# Altium PCB rocket_main.PcbDoc (part 2 of 2)
Units mil, origin at the board's own origin, x right, y up, seen from the top; angles counter-clockwise.
Board outline 3500 x 8650 mil, 4 copper layers (Top Copper, Signal Layer 1, Signal Layer 2, Bottom Copper), stack 61.811 mil thick; 167 components, 107 nets, 665 pads, 215 vias.
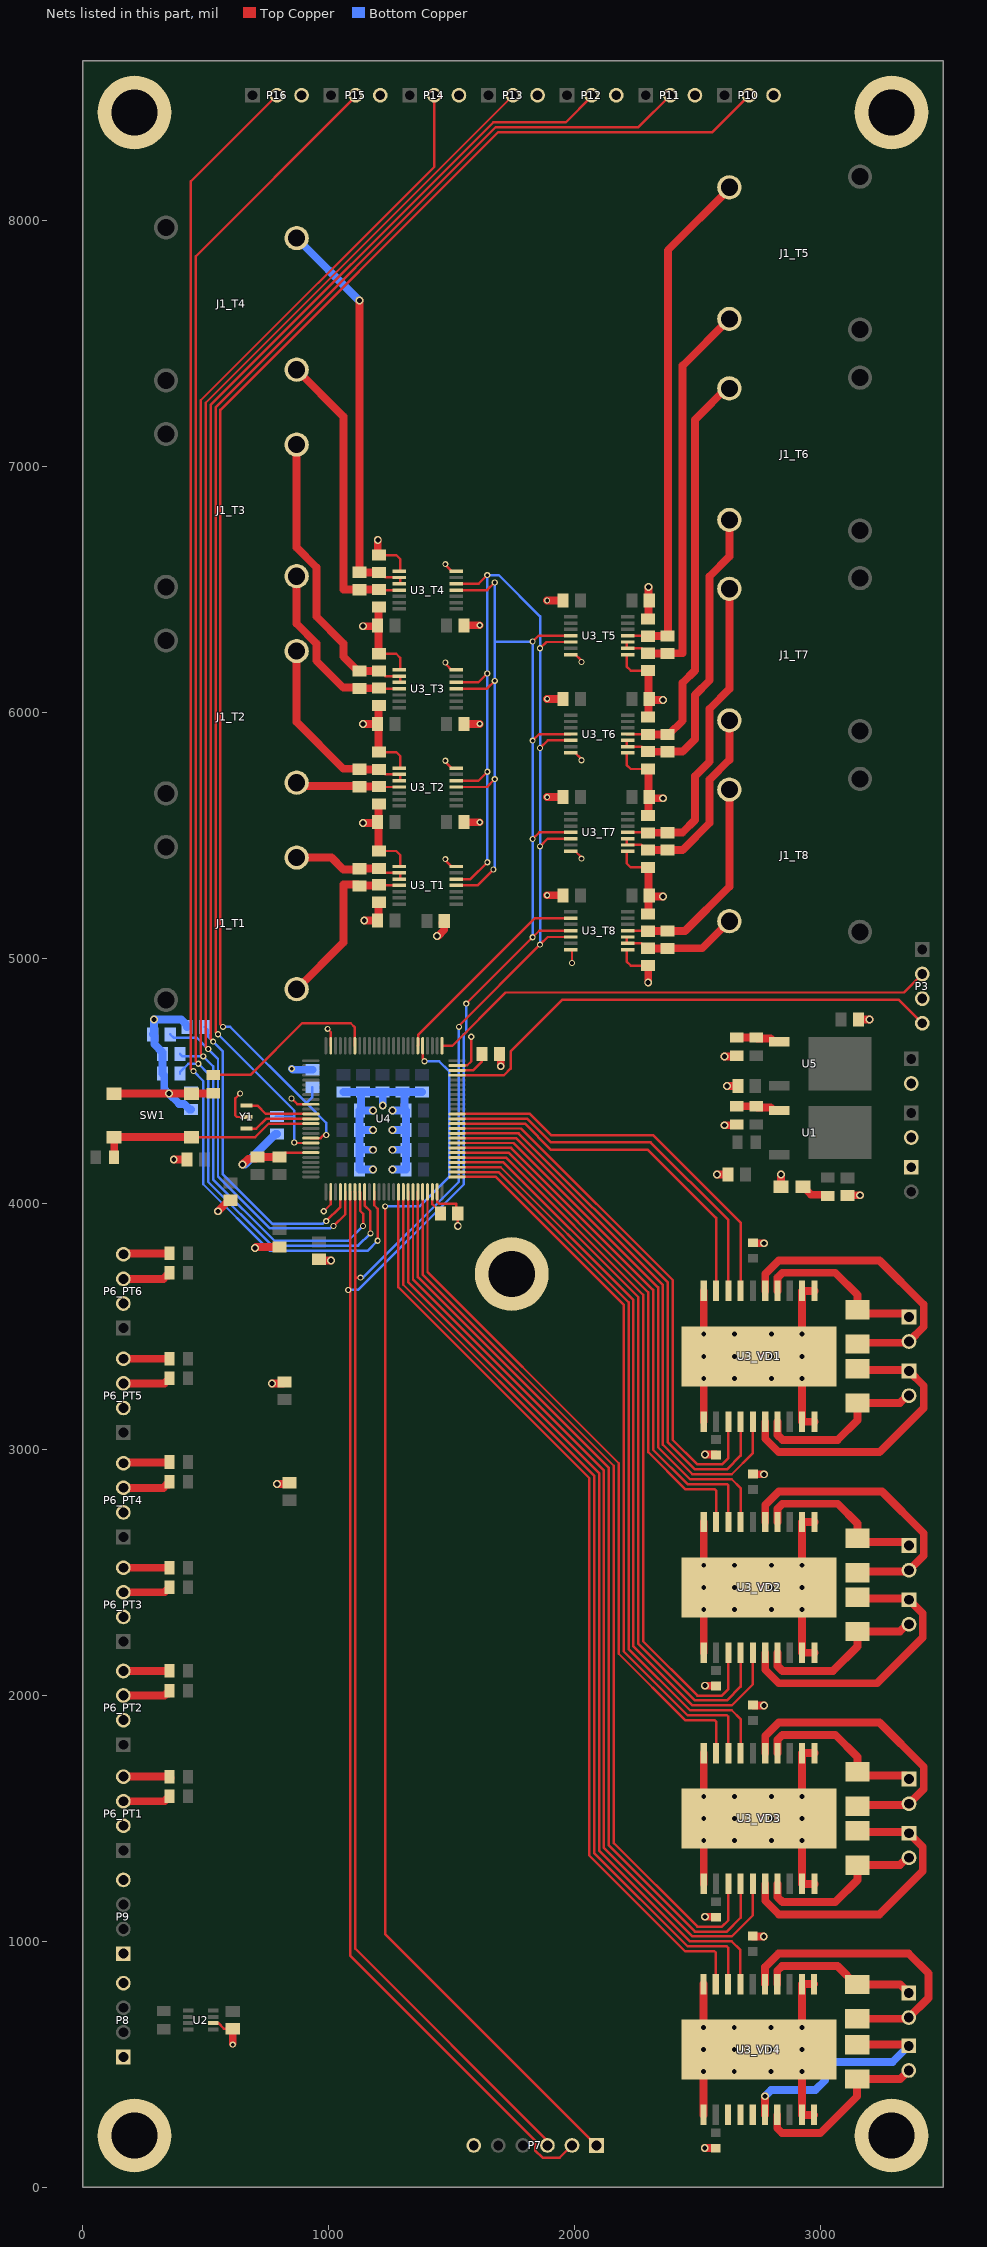
[diagram p4: the nets of this part, all layers, seen from the top]

## Via types
v1: diameter 32, hole 20, Top Copper to Bottom Copper, 129 vias
v2: diameter 25, hole 15, Top Copper to Bottom Copper, 86 vias

## Nets (pads, with @x,y where several pads share a name; then routed paths per layer and width w, separated by ;. In a path a pad name is that pad's centre, name@x,y a point inside that pad or via, vN(x,y) a via of type N, cw(c..) or ccw(c..) an arc to the next point about the centre after c; other vN are vias at no path point) (continued)
CS8: U3_T8.9 U4.81 | length 859.6
  Top Copper w10: U4.81@1362.8,4643.35 1364.02,4644.57 1364.02,4686.54 1840,5162.52 U3_T8.9@1982.72,5162.52
CS9: P7.1 U4.80 | length 5127.2
  Top Copper w10: v2(1230,3990) 1230,1030 P7.1@2090,170 P7.1@2110,150 ; U4.80@1382.48,4643.35 1382.48,4591.58 1390,4584.06 v2(1390,4580)
  Bottom Copper w10: v2(1230,3990) 1370,3990 1490,4110 1490,4540 1450,4580 v2(1390,4580)
ENABLEA1: U3_VD1.8 U4.63 | length 1562.5
  Top Copper w10: U4.63@1522.24,4346.1 1808.9,4346.1 1905,4250 2310,4250 2626,3934 U3_VD1.8@2626,3646
ENABLEA2: U3_VD2.8 U4.57 | length 2201.6
  Top Copper w10: U4.57@1522.24,4227.99 1742.01,4227.99 2320,3650 2320,3000 2460,2860 2620,2860 2626,2854 U3_VD2.8@2626,2706
ENABLEA3: U3_VD3.8 U4.51 | length 2987.3
  Top Copper w10: U4.51@1522.24,4109.88 1680.12,4109.88 2200,3590 2200,2180 2460,1920 2620,1920 2626,1914 U3_VD3.8@2626,1766
ENABLEA4: U3_VD4.8 U4.42 | length 3863.4
  Top Copper w10: U4.42@1303.74,4048.86 1303.74,3671.26 2080,2895 2080,1360 2460,980 2619.14,980 2625,974.14 U3_VD4.8@2625,826
ENABLEB1: U3_VD1.14 U4.60 | length 2262
  Top Copper w10: U4.60@1522.24,4287.05 1772.95,4287.05 2380,3680 2380,3030 2490,2920 2620,2920 2676,2976 U3_VD1.14@2676,3114
ENABLEB2: U3_VD2.14 U4.54 | length 3047.6
  Top Copper w10: U4.54@1522.24,4168.94 1711.06,4168.94 2260,3620 2260,2210 2490,1980 2620,1980 2676,2036 U3_VD2.14@2676,2174
ENABLEB3: U3_VD3.14 U4.45 | length 3823
  Top Copper w10: U4.45@1362.8,4048.86 1362.8,3702.2 2140,2925 2140,1390 2490,1040 2620,1040 2676,1096 U3_VD3.14@2676,1234
ENABLEB4: U3_VD4.14
GND: C1.2 C2.2 C3.2 C4.2 C5.2 C6.2 C7.2 C8.2 C9.2 C10.2 C11.2 C12.2 C13.2 C14.2 C15.2 C16.2 C17.2 C18.2 C19.2 C20_T1.2 C20_T2.2 C20_T3.2 C20_T4.2 C20_T5.2 C20_T6.2 C20_T7.2 C20_T8.2 C20_VD1.2 C20_VD2.2 C20_VD3.2 C20_VD4.2 C21_VD1.2 C21_VD2.2 C21_VD3.2 C21_VD4.2 C22.2 C22_T1.2 C22_T2.2 C22_T3.2 C22_T4.2 C22_T5.2 C22_T6.2 C22_T7.2 C22_T8.2 C23.2 C23_T1.2 C23_T2.2 C23_T3.2 C23_T4.2 C23_T5.2 C23_T6.2 C23_T7.2 C23_T8.2 C24_T1.2 C24_T2.2 C24_T3.2 C24_T4.2 C24_T5.2 C24_T6.2 C24_T7.2 C24_T8.2 C25.2 C26_PT1.2 C26_PT2.2 C26_PT3.2 C26_PT4.2 C26_PT5.2 C26_PT6.2 C27.2 C28.2 C29.2 C30.2 C31.2 C32.2 C33.2 D3.K P1.1 P2.2 P3.3 P6.2 P6_PT1.2 P6_PT1.4 P6_PT2.2 P6_PT2.4 P6_PT3.2 P6_PT3.4 P6_PT4.2 P6_PT4.4 P6_PT5.2 P6_PT5.4 P6_PT6.2 P6_PT6.4 P7.6 P8.1 P8.4 P9.1 P9.4 P10.3 P11.3 P12.3 P13.3 P14.3 P15.3 P16.3 pad.2 pad.3 pad.4 pad.5 R2.1 R4.2 R6.1 R7_PT1.1 R7_PT2.1 R7_PT3.1 R7_PT4.1 R7_PT5.1 R7_PT6.1 SW1.2 U2.2 U3_T1.1 U3_T1.14 U3_T2.1 U3_T2.14 U3_T3.1 U3_T3.14 U3_T4.1 U3_T4.14 U3_T5.1 U3_T5.14 U3_T6.1 U3_T6.14 U3_T7.1 U3_T7.14 U3_T8.1 U3_T8.14 U3_VD1.1 U3_VD1.2 U3_VD1.10 U3_VD1.11 U3_VD1.19 U3_VD1.20 U3_VD1.EPAD U3_VD2.1 U3_VD2.2 U3_VD2.10 U3_VD2.11 U3_VD2.19 U3_VD2.20 U3_VD2.EPAD U3_VD3.1 U3_VD3.2 U3_VD3.10 U3_VD3.11 U3_VD3.19 U3_VD3.20 U3_VD3.EPAD U3_VD4.1 U3_VD4.2 U3_VD4.10 U3_VD4.11 U3_VD4.19 U3_VD4.20 U3_VD4.EPAD U4.10 U4.20 U4.27 U4.49 U4.74 U4.99 Y1.2 | length 16404.2
  Top Copper w10: R4.2@530,4450 R4.2@536.89,4450 ; U2.2@531.18,667.2 551.46,667.2 574.09,644.57 580,644.57 ; v2(640,4449.29) 620,4429.29 620,4360 626.5,4353.5 Y1.2@666.02,4353.5 ; C5.2@800,4190.43 805.91,4190.43 823.78,4208.31 U4.20@927.76,4208.31 ; v2(849,4429) 872.84,4405.16 U4.10@927.76,4405.16 ; v2(980,3970) 1008.46,3998.46 U4.27@1008.46,4048.86 ; v2(996,4712) 996,4711.11 1008.46,4698.64 U4.99@1008.46,4643.35 ; C20_T1.2@1204.92,5435.63 1274.92,5435.63 1291.42,5419.13 U3_T1.1@1291.42,5372.6 ; C20_T2.2@1204.92,5838.03 1274.92,5838.03 1291.42,5821.54 U3_T2.1@1291.42,5772.6 ; C20_T3.2@1205.04,6237.91 1274.92,6237.91 1291.42,6221.42 U3_T3.1@1291.42,6172.6 ; C20_T4.2@1210.94,6639.25 1274.92,6639.25 1291.42,6622.76 U3_T4.1@1291.42,6573.82 ; U4.49@1441.54,4048.86 1442.76,4047.64 1442.76,4007.24 1450,4000 1519.58,4000 1519.58,3965.86 C19.2@1525.43,3960 v1(1525.43,3910) ; v2(1474.92,5402.6) 1477.79,5399.73 1477.79,5395.2 1500.39,5372.6 U3_T1.14@1519.09,5372.6 U3_T1.14@1521.06,5372.6 ; v2(1474.92,5802.6) 1477.79,5799.73 1477.79,5795.2 1500.39,5772.6 U3_T2.14@1519.09,5772.6 U3_T2.14@1521.06,5772.6 ; v2(1474.92,6202.6) 1477.79,6199.73 1477.79,6195.2 1500.39,6172.6 U3_T3.14@1519.09,6172.6 U3_T3.14@1521.06,6172.6 ; v2(1474.92,6602.6) 1474.92,6599.29 1500.39,6573.82 U3_T4.14@1519.09,6573.82 U3_T4.14@1521.06,6573.82 ; U4.74@1522.24,4562.64 1523.46,4563.86 1563.86,4563.86 1580,4580 v2(1580,4680) ; U3_T7.14@1982.72,5434.57 U3_T7.14@1984.69,5434.57 2003.39,5434.57 2025.99,5411.96 2025.99,5407.44 v2(2028.86,5404.57) ; U3_T6.14@1982.72,5834.57 U3_T6.14@1984.69,5834.57 2003.39,5834.57 2025.99,5811.96 2025.99,5807.44 v2(2028.86,5804.57) ; U3_T5.14@1982.72,6234.57 U3_T5.14@1984.69,6234.57 2003.39,6234.57 2025.99,6211.96 2025.99,6207.44 v2(2028.86,6204.57) ; U3_T8.14@1984.69,5034.57 1990,5029.25 v2(1990,4980) ; U3_T8.1@2212.36,5034.57 2212.36,4985.63 2228.86,4969.13 C20_T8.2@2298.74,4969.13 ; U3_T7.1@2212.36,5434.57 2212.36,5385.63 2228.86,5369.13 C20_T7.2@2298.74,5369.13 ; U3_T6.1@2212.36,5834.57 2212.36,5785.63 2228.86,5769.13 C20_T6.2@2298.74,5769.13 ; U3_T5.1@2212.36,6234.57 2212.36,6185.63 2228.86,6169.13 C20_T5.2@2299.29,6169.13
  Top Copper w32: SW1.2@126.1,4450 SW1.2@127.52,4448.58 v1(350,4448.58) SW1.2@442.48,4448.58 443.19,4449.29 529.29,4449.29 R4.2@530,4450 ; P6_PT2.4@165,2100 R7_PT2.1@352.6,2100 R7_PT2.1@353.58,2100.98 ; P6_PT3.4@165,2520 R7_PT3.1@352.6,2520 R7_PT3.1@353.58,2520.98 ; P6_PT4.4@165,2945 167.5,2947.5 350.1,2947.5 R7_PT4.1@352.6,2950 R7_PT4.1@353.58,2950.98 ; P6_PT5.4@165,3370 R7_PT5.1@352.6,3370 R7_PT5.1@353.58,3370.98 ; P6_PT6.4@165,3795 167.5,3797.5 350.1,3797.5 R7_PT6.1@352.6,3800 R7_PT6.1@353.58,3800.98 ; P6_PT1.4@170,1665 P6_PT1.4@165,1670 347.93,1670 352.6,1665.33 352.6,1665 R7_PT1.1@357.6,1665 ; R7_PT1.1@352.6,1670 R7_PT1.1@353.58,1670.98 ; v1(370,4180) C26_PT6.2@424.57,4180 C26_PT6.2@423.58,4179.02 ; v1(550,3970) 550,3970.47 594.09,4014.57 C26_PT5.2@600,4014.57 C26_PT5.2@600.98,4013.58 ; v2@610,585.13 C3.2@610,640 ; v1(650,4160) 673.8,4183.8 703.36,4183.8 C4.2@710,4190.43 C5.2@800,4190.43 ; v1(700,3820) 704.57,3824.57 C26_PT4.2@800,3824.57 C26_PT4.2@800.98,3823.58 ; v1(770,3270) 814.57,3270 C26_PT3.2@820,3275.43 C26_PT3.2@819.02,3276.42 ; v1(790,2860) 834.57,2860 C26_PT2.2@840,2865.43 C26_PT2.2@839.02,2866.42 ; C26_PT1.2@960.98,3774.57 965.55,3770 v1(1010,3770) ; v1(1140,5550) 1196.89,5550 C23_T2.2@1199.49,5552.6 ; v1(1140,5952.6) C23_T3.2@1199.49,5952.6 ; v1(1140,6350) 1195.67,6350 C23_T4.2@1199.49,6353.82 ; v1(1144.92,5152.6) C23_T1.2@1199.49,5152.6 1202.2,5155.32 1202.2,5224.45 C22_T1.2@1204.92,5227.17 ; v1(1200,6700) 1200,6644.29 C20_T4.2@1205.04,6639.25 C20_T4.2@1210.94,6639.25 ; C20_T1.2@1204.92,5435.63 1202.2,5438.35 1202.2,5549.88 C23_T2.2@1199.49,5552.6 ; C22_T2.2@1204.92,5627.17 1202.2,5624.45 1202.2,5555.32 C23_T2.2@1199.49,5552.6 ; C20_T2.2@1204.92,5838.03 1202.2,5840.75 1202.2,5949.88 C23_T3.2@1199.49,5952.6 ; C22_T3.2@1204.92,6027.17 1202.2,6024.45 1202.2,5955.32 C23_T3.2@1199.49,5952.6 ; C20_T3.2@1205.04,6237.91 C20_T3.2@1204.92,6238.03 1202.2,6240.75 1202.2,6351.1 C23_T4.2@1199.49,6353.82 ; C22_T4.2@1205.04,6428.39 1202.26,6425.61 1202.26,6356.59 C23_T4.2@1199.49,6353.82 ; v1(1440.43,5090) 1445.43,5090 1470.43,5115 C24_T1.2@1470.43,5150 C24_T1.2@1463.8,5143.36 ; C24_T2.2@1550.35,5552.6 v2(1614.92,5552.6) ; C24_T3.2@1550.35,5952.6 v2(1614.92,5952.6) ; C24_T4.2@1550.35,6353.82 v2(1614.92,6353.82) ; C25.2@1695.43,4610 1700,4605.43 v1(1700,4560) ; v2(1888.86,5255.28) C24_T8.2@1953.43,5255.28 ; v2(1888.86,5654.57) C24_T7.2@1953.43,5654.57 ; v2(1888.86,6054.57) C24_T6.2@1953.43,6054.57 ; v2(1888.86,6454.57) C24_T5.2@1953.43,6454.57 ; C20_T8.2@2298.74,4969.13 2300,4967.87 v1(2300,4900) ; C20_T7.2@2298.74,5369.13 2301.52,5366.36 2301.52,5257.34 C23_T8.2@2304.29,5254.57 ; C22_T7.2@2298.74,5580 2301.52,5582.78 2301.52,5651.79 C23_T7.2@2304.29,5654.57 ; C20_T6.2@2298.74,5769.13 2301.52,5766.36 2301.52,5657.34 C23_T7.2@2304.29,5654.57 ; C22_T6.2@2298.74,5980 2301.52,5982.78 2301.52,6051.79 C23_T6.2@2304.29,6054.57 ; C22_T5.2@2298.74,6380 2301.52,6382.78 2301.52,6451.79 C23_T5.2@2304.29,6454.57 2301.52,6457.34 v1(2301.52,6510) ; C22_T8.2@2299.29,5180 2301.79,5182.5 2301.79,5252.07 C23_T8.2@2304.29,5254.57 ; C20_T5.2@2299.29,6169.13 2301.79,6166.63 2301.79,6057.07 C23_T6.2@2304.29,6054.57 ; v1(2360,5250) 2308.86,5250 C23_T8.2@2304.29,5254.57 ; v1(2360,5650) 2308.86,5650 C23_T7.2@2304.29,5654.57 ; v1(2360,6050) 2308.86,6050 C23_T6.2@2304.29,6054.57 ; U3_VD4.11@2525,294 2525,454 U3_VD4.EPAD@2631,560 ; U3_VD4.10@2525,826 2525,666 U3_VD4.EPAD@2631,560 ; U3_VD3.11@2526,1234 2526,1394 U3_VD3.EPAD@2632,1500 ; U3_VD3.10@2526,1766 2526,1606 U3_VD3.EPAD@2632,1500 ; U3_VD2.11@2526,2174 2526,2334 U3_VD2.EPAD@2632,2440 ; U3_VD2.10@2526,2706 2526,2546 U3_VD2.EPAD@2632,2440 ; U3_VD1.11@2526,3114 2526,3274 U3_VD1.EPAD@2632,3380 ; U3_VD1.10@2526,3646 2526,3486 U3_VD1.EPAD@2632,3380 ; v1(2530,160) 2573.5,160 C21_VD4.2@2575,158.5 ; v1(2531,1100) C21_VD3.2@2574.5,1100 ; v1(2531,2040) 2574.5,2040 C21_VD2.2@2576,2038.5 ; v1(2531,2980) 2574.5,2980 C21_VD1.2@2576,2978.5 ; v1(2580,4120) 2624.13,4120 C2.2@2624.57,4119.57 ; v1(2610,4320) 2657.4,4320 R2.1@2660,4322.6 ; v1(2610,4600) 2657.4,4600 R6.1@2660,4602.6 ; v1(2620,4479.57) 2663.9,4479.57 C23.2@2664.57,4480.24 ; C20_VD4.2@2725,1021.5 2726.5,1020 v1(2770,1020) ; C20_VD3.2@2726,1961.5 2727.5,1960 v1(2771,1960) ; C20_VD2.2@2726,2901.5 2727.5,2900 v1(2771,2900) ; C20_VD1.2@2726,3841.5 2727.5,3840 v1(2771,3840) ; D3.K@2840,4070 v1(2840,4120) ; U3_VD4.20@2975,294 U3_VD4.19@2925,294 2925,454 U3_VD4.EPAD@2819,560 ; U3_VD4.1@2975,826 U3_VD4.2@2925,826 2925,666 U3_VD4.EPAD@2819,560 ; U3_VD3.20@2976,1234 U3_VD3.19@2926,1234 2926,1394 U3_VD3.EPAD@2820,1500 ; U3_VD3.1@2976,1766 U3_VD3.2@2926,1766 2926,1606 U3_VD3.EPAD@2820,1500 ; U3_VD2.20@2976,2174 U3_VD2.19@2926,2174 2926,2334 U3_VD2.EPAD@2820,2440 ; U3_VD2.1@2976,2706 U3_VD2.2@2926,2706 2926,2546 U3_VD2.EPAD@2820,2440 ; U3_VD1.20@2976,3114 U3_VD1.19@2926,3114 2926,3274 U3_VD1.EPAD@2820,3380 ; U3_VD1.1@2976,3646 U3_VD1.2@2926,3646 2926,3486 U3_VD1.EPAD@2820,3380 ; C1.2@3110,4034.57 3110.43,4035 v1(3161.5,4035) ; C22.2@3155.43,4750 v1(3200,4750) ; U3_VD4.EPAD@2631,560 v1(2650,560) U3_VD4.EPAD@2750,560 v1(2800,560) U3_VD4.EPAD@2819,560 ; U3_VD3.EPAD@2632,1500 v1(2651,1500) U3_VD3.EPAD@2751,1500 v1(2801,1500) U3_VD3.EPAD@2820,1500 ; U3_VD2.EPAD@2632,2440 v1(2651,2440) U3_VD2.EPAD@2751,2440 v1(2801,2440) U3_VD2.EPAD@2820,2440 ; U3_VD1.EPAD@2632,3380 v1(2651,3380) U3_VD1.EPAD@2751,3380 v1(2801,3380) U3_VD1.EPAD@2820,3380
  Bottom Copper w32: C29.2@424.57,4720 424.57,4725.91 400.47,4750 v1(290,4750) 290,4695.43 C30.2@284.57,4690 291.2,4683.36 291.2,4649.27 324.57,4615.91 C31.2@324.57,4610 C32.2@324.57,4530 331.2,4523.36 331.2,4467.38 v1(350,4448.58) 391.79,4406.8 411.87,4406.8 434.09,4384.57 C33.2@440,4384.57 ; v1(650,4160) 659.53,4160 784.09,4284.57 C28.2@790,4284.57 ; v2(850,4550) 854.57,4545.43 C27.2@934.1,4545.43 ; C10.2@1060,4454.57 C9.2@1138.71,4454.57 ; v1(1180,4140) C15.2@1125.43,4140 C16.2@1125.43,4220 ; v1(1180,4220) C16.2@1125.43,4220 ; v1(1180,4300) C17.2@1125.43,4300 ; v1(1180,4380) C18.2@1125.43,4380 ; v1(1220,4400) C8.2@1220,4454.57 ; v1(1260,4140) C14.2@1314.57,4140 C13.2@1314.57,4220 ; v1(1260,4220) C13.2@1314.57,4220 ; v1(1260,4300) C12.2@1314.57,4300 ; v1(1260,4380) C11.2@1314.57,4380 ; C6.2@1380,4454.57 C7.2@1301.29,4454.57 ; C16.2@1125.43,4220 C17.2@1125.43,4300 ; C17.2@1125.43,4300 C18.2@1125.43,4380 ; C18.2@1125.43,4380 1132.07,4386.64 1132.07,4447.93 C9.2@1138.71,4454.57 ; C9.2@1138.71,4454.57 C9.2@1140,4454.57 C8.2@1220,4454.57 ; C8.2@1220,4454.57 C7.2@1300,4454.57 C7.2@1301.29,4454.57 ; C7.2@1301.29,4454.57 1307.93,4447.93 1307.93,4386.64 C11.2@1314.57,4380 ; C13.2@1314.57,4220 C12.2@1314.57,4300 ; C12.2@1314.57,4300 C11.2@1314.57,4380
  other v1: 2525,470 2650,470 2800,470 2925,470 2525,560 2925,560 2525,650 2650,650 2800,650 2925,650 2526,1410 2651,1410 2801,1410 2926,1410 2526,1500 2926,1500 2526,1590 2651,1590 2801,1590 2926,1590 2526,2350 2651,2350 2801,2350 2926,2350 2526,2440 2926,2440 2526,2530 2651,2530 2801,2530 2926,2530 2526,3290 2651,3290 2801,3290 2926,3290 2526,3380 2926,3380 2526,3470 2651,3470 2801,3470 2926,3470
  other v2: 610,580
MISO: P7.2 U3_T1.11 U3_T2.11 U3_T3.11 U3_T4.11 U3_T5.11 U3_T6.11 U3_T7.11 U3_T8.11 U4.31 | length 10050.6
  Top Copper w10: v2(1080.03,3650) v2@1087.2,3650 ; U4.31@1087.2,4048.86 v2@1087.2,3650 ; U3_T4.11@1501.06,6497.05 U3_T4.11@1519.09,6497.05 1644.88,6497.05 v2(1675.63,6527.8) ; U3_T1.11@1521.06,5295.83 1605.83,5295.83 v2(1670,5360) ; U3_T2.11@1521.06,5695.83 1643.66,5695.83 v2(1675.63,5727.8) ; U3_T3.11@1521.06,6095.83 1643.66,6095.83 v2(1675.63,6127.8) ; v2(1560,4814.57) v2(1830,5084.57) 1856.77,5111.34 U3_T8.11@1982.72,5111.34 ; v2(1830,5484.57) 1856.77,5511.34 U3_T7.11@1982.72,5511.34 ; v2(1830,5884.57) 1856.77,5911.34 U3_T6.11@1982.72,5911.34 ; v2(1830,6287.66) 1853.68,6311.34 U3_T5.11@1982.72,6311.34 ; P7.2@1990,170 1940,120 1870,120 1840,150 1840,190 1087.2,942.8 v2@1087.2,3650
  Bottom Copper w10: v2(1080.03,3650) 1120,3650 1550,4080 1550,4690 1560,4700 v2(1560,4814.57) ; v2(1670,5360) 1675.63,5365.63 v2(1675.63,5727.8) v2(1675.63,6127.8) 1675.63,6290 ; v2(1675.63,6527.8) 1675.63,6290 ; v2(1830,5084.57) v2(1830,5484.57) v2(1830,5884.57) v2(1830,6287.66) 1677.97,6287.66 1675.63,6290
MOSI: P7.3 U3_T1.12 U3_T2.12 U3_T3.12 U3_T4.12 U3_T5.12 U3_T6.12 U3_T7.12 U3_T8.12 U4.32 | length 9787.5
  Top Copper w10: U4.32@1106.89,4048.86 1108.11,4047.64 1108.11,3700 ; v2(1130,3700) 1108.11,3700 ; U3_T4.12@1501.06,6522.64 1521.06,6522.64 1610.04,6522.64 v2(1645.2,6557.8) ; U3_T1.12@1521.06,5321.42 1577.05,5321.42 v2(1645.63,5390) ; U3_T2.12@1521.06,5721.42 1609.25,5721.42 v2(1645.63,5757.8) ; U3_T3.12@1521.06,6121.42 1608.82,6121.42 v2(1645.2,6157.8) ; v2(1530,4720) 1530,4724.57 v2(1860,5054.57) 1891.18,5085.75 U3_T8.12@1982.72,5085.75 ; v2(1860,5454.57) 1891.18,5485.75 U3_T7.12@1982.72,5485.75 ; v2(1860,5854.57) 1891.18,5885.75 U3_T6.12@1982.72,5885.75 ; v2(1860,6260.16) 1885.59,6285.75 U3_T5.12@1982.72,6285.75 ; P7.3@1888.86,171.14 P7.3@1890,170 ; P7.3@1888.86,190 1108.11,970.75 1108.11,3700
  Bottom Copper w10: v2(1130,3700) 1140,3700 1530,4090 v2(1530,4720) ; v2(1645.63,5390) v2(1645.63,5757.8) 1645.63,5951.89 1645.2,5952.32 v2(1645.2,6157.8) v2(1645.2,6557.8) 1692.2,6557.8 1860,6390 v2(1860,6260.16) v2(1860,5854.57) v2(1860,5454.57) v2(1860,5054.57)
NetC19_1: C19.1 U4.48 | length 104.3
  Top Copper w10: U4.48@1421.85,4048.86 1421.85,3998.62 1451.42,3969.06 C19.1@1451.42,3956.85
NetC20_T1_1: C20_T1.1 C21_T1.1 J1_T1.K U3_T1.2 U3_T1.3 | length 476.5
  Top Copper w10: C20_T1.1@1204.92,5364.76 1222.56,5347.13 1291.3,5347.13 1291.42,5347.01 U3_T1.3@1291.42,5321.42
  Top Copper w32: J1_T1.K@870,5408.74 1011.26,5408.74 1060,5360 1121.46,5360 C21_T1.1@1124.92,5363.46 1125.57,5364.11 1204.27,5364.11 C20_T1.1@1204.92,5364.76
NetC20_T2_1: C20_T2.1 C21_T2.1 J1_T2.K U3_T2.2 U3_T2.3 | length 824
  Top Copper w10: C20_T2.1@1204.92,5767.17 1210.83,5767.17 1230.98,5747.01 1268.78,5747.01 1291.42,5747.01 U3_T2.3@1291.42,5721.42
  Top Copper w32: J1_T2.K@870,6248.74 870,5960 1060,5770 1123.6,5770 C21_T2.1@1125.57,5768.03 1126,5767.6 1204.49,5767.6 C20_T2.1@1204.92,5767.17
NetC20_T3_1: C20_T3.1 C21_T3.1 J1_T3.K U3_T3.2 U3_T3.3 | length 1230.6
  Top Copper w10: C20_T3.1@1204.49,6167.6 1210.39,6167.6 1230.98,6147.01 1268.78,6147.01 1291.42,6147.01 U3_T3.3@1291.42,6121.42
  Top Copper w32: J1_T3.K@870,7088.74 870,6670 950,6590 950,6390 1060,6280 1060,6227.05 1119.02,6168.03 C21_T3.1@1124.92,6168.03 1125.35,6167.6 C20_T3.1@1204.49,6167.6
NetC20_T4_1: C20_T4.1 C21_T4.1 J1_T4.K U3_T4.2 U3_T4.3 | length 1666.7
  Top Copper w10: v1@1124.92,7674.92 v1(1125,7675) ; C20_T4.1@1205.04,6568.39 1210.94,6568.39 1231.1,6548.23 1268.78,6548.23 1291.42,6548.23 U3_T4.3@1291.42,6522.64
  Top Copper w32: v1@1124.92,7674.92 C21_T4.1@1124.92,6569.25 1125.35,6568.82 1204.61,6568.82 C20_T4.1@1205.04,6568.39
  Bottom Copper w10: v1@1123.74,7675 v1(1125,7675)
  Bottom Copper w32: J1_T4.K@870,7928.74 v1@1123.74,7675
NetC20_T5_1: C20_T5.1 C21_T5.1 J1_T5.K U3_T5.2 U3_T5.3 | length 1701
  Top Copper w10: U3_T5.3@2212.36,6285.75 2212.36,6260.16 U3_T5.2@2216.97,6260.16 2273.23,6260.16 2293.39,6240 C20_T5.1@2299.29,6240
  Top Copper w32: C20_T5.1@2299.29,6240 2299.72,6239.57 2378.43,6239.57 C21_T5.1@2378.86,6239.13 2379.72,6240 2440,6240 2440,7410 J1_T5.K@2630,7600
NetC20_T6_1: C20_T6.1 C21_T6.1 J1_T6.K U3_T6.2 U3_T6.3 | length 1283.3
  Top Copper w10: U3_T6.3@2212.36,5885.75 2212.36,5860.16 U3_T6.2@2216.97,5860.16 2272.68,5860.16 2292.83,5840 C20_T6.1@2298.74,5840
  Top Copper w32: C20_T6.1@2298.74,5840 2299.17,5839.57 2377.78,5839.57 C21_T6.1@2378.21,5839.13 2379.07,5840 2440,5840 2490,5890 2490,6070 2550,6130 2550,6553.31 2630,6633.31 J1_T6.K@2630,6782.28
NetC20_T7_1: C20_T7.1 C21_T7.1 J1_T7.K U3_T7.2 U3_T7.3 | length 867.8
  Top Copper w10: U3_T7.3@2212.36,5485.75 2212.36,5460.16 U3_T7.2@2216.97,5460.16 2272.68,5460.16 2292.83,5440 C20_T7.1@2298.74,5440
  Top Copper w32: C20_T7.1@2298.74,5440 2299.17,5439.57 2377.34,5439.57 C21_T7.1@2377.78,5439.13 2378.64,5440 2440,5440 2550,5550 2550,5726.36 2630,5806.36 J1_T7.K@2630,5966.85
NetC20_T8_1: C20_T8.1 C21_T8.1 J1_T8.K U3_T8.2 U3_T8.3 | length 497.9
  Top Copper w10: U3_T8.3@2212.36,5085.75 2212.36,5060.16 2235,5060.16 2272.68,5060.16 2292.83,5040 C20_T8.1@2298.74,5040
  Top Copper w32: C20_T8.1@2298.74,5040 2299.17,5039.57 2378.43,5039.57 C21_T8.1@2378.86,5039.13 2379.72,5040 2450,5040 2520,5040 J1_T8.K@2630,5150
NetC21_T1_2: C21_T1.2 C22_T1.1 J1_T1.+ U3_T1.4 | length 743
  Top Copper w10: C22_T1.1@1204.92,5298.03 1207.13,5295.83 1268.78,5295.83 U3_T1.4@1291.42,5295.83
  Top Copper w32: J1_T1.+@870,4873.31 1060,5063.31 1060,5300 1060.76,5299.24 1118.28,5299.24 C21_T1.2@1124.92,5292.6 1127.64,5295.32 1202.2,5295.32 C22_T1.1@1204.92,5298.03
NetC21_T2_2: C21_T2.2 C22_T2.1 J1_T2.+ U3_T2.4 | length 429.4
  Top Copper w10: C22_T2.1@1204.92,5698.03 1207.13,5695.83 1268.78,5695.83 U3_T2.4@1291.42,5695.83
  Top Copper w32: J1_T2.+@870,5713.31 882.71,5700.6 929.4,5700.6 930,5700 1060,5700 1122.74,5700 C21_T2.2@1125.57,5697.17 1126,5697.6 1204.49,5697.6 C22_T2.1@1204.92,5698.03
NetC21_T3_2: C21_T3.2 C22_T3.1 J1_T3.+ U3_T3.4 | length 765.9
  Top Copper w10: C22_T3.1@1204.92,6098.03 1207.13,6095.83 1268.78,6095.83 U3_T3.4@1291.42,6095.83
  Top Copper w32: J1_T3.+@870,6553.31 870,6360 950,6280 950,6210 1060,6100 1122.09,6100 C21_T3.2@1124.92,6097.17 1125.35,6097.6 1204.49,6097.6 C22_T3.1@1204.92,6098.03
NetC21_T4_2: C21_T4.2 C22_T4.1 J1_T4.+ U3_T4.4 | length 1205
  Top Copper w10: C22_T4.1@1204.61,6498.82 1206.38,6497.05 1268.78,6497.05 U3_T4.4@1291.42,6497.05
  Top Copper w32: J1_T4.+@870,7393.31 1060,7203.31 1060,6500 1123.31,6500 C21_T4.2@1124.92,6498.39 1125.35,6498.82 C22_T4.1@1204.61,6498.82
NetC21_T5_2: C21_T5.2 C22_T5.1 J1_T5.+ U3_T5.4 | length 2095.3
  Top Copper w10: U3_T5.4@2212.36,6311.34 U3_T5.4@2216.97,6311.34 2296.54,6311.34 C22_T5.1@2298.74,6309.13
  Top Copper w32: C22_T5.1@2298.74,6309.13 2299.17,6309.57 2378.43,6309.57 C21_T5.2@2378.86,6310 2380,6311.14 2380,7879 J1_T5.+@2633.22,8132.22
NetC21_T6_2: C21_T6.2 C22_T6.1 J1_T6.+ U3_T6.4 | length 1694.9
  Top Copper w10: U3_T6.4@2212.36,5911.34 U3_T6.4@2216.97,5911.34 2296.54,5911.34 C22_T6.1@2298.74,5909.13
  Top Copper w32: C22_T6.1@2298.74,5909.13 2299.17,5909.57 2377.78,5909.57 C21_T6.2@2378.21,5910 2384.11,5910 2440,5965.89 2440,6120 2490,6170 2490,7190 J1_T6.+@2630,7330
NetC21_T7_2: C21_T7.2 C22_T7.1 J1_T7.+ U3_T7.4 | length 1299.1
  Top Copper w10: U3_T7.4@2212.36,5511.34 U3_T7.4@2216.97,5511.34 2296.54,5511.34 C22_T7.1@2298.74,5509.13
  Top Copper w32: C22_T7.1@2298.74,5509.13 2299.17,5509.57 2377.34,5509.57 C21_T7.2@2377.78,5510 2379.14,5511.36 2440,5511.36 2490,5561.36 2490,5740 2550,5800 2550,6014.48 2630,6094.48 J1_T7.+@2630,6502.28
NetC21_T8_2: C21_T8.2 C22_T8.1 J1_T8.+ U3_T8.4 | length 888.5
  Top Copper w10: U3_T8.4@2212.36,5111.34 2235,5111.34 2297.95,5111.34 C22_T8.1@2299.72,5109.57
  Top Copper w32: C22_T8.1@2299.72,5109.57 2378.43,5109.57 C21_T8.2@2378.86,5110 2450,5110 2630,5290 J1_T8.+@2630,5685.43
NetC25_1: C25.1 U4.73 | length 147.7
  Top Copper w10: U4.73@1522.24,4542.95 1587.52,4542.95 1622.52,4577.95 1622.52,4607.95 C25.1@1624.57,4610
NetD1_VD1_A: D1_VD1.A P4_VD1.1 U3_VD1.4 | length 706.9
  Top Copper w32: U3_VD1.4@2826,3646 2826,3700 2846,3720 3061,3720 3151,3630 3151,3570.24 D1_VD1.A@3151.24,3570 3167.24,3554 3347,3554 P4_VD1.1@3361,3540
NetD1_VD1_K: D1_VD1.K P4_VD1.2 U3_VD1.5 | length 1200.3
  Top Copper w32: U3_VD1.5@2776,3646 2776,3715 2831,3770 3241,3770 3421,3590 3421,3500 P4_VD1.2@3361,3440 3356.12,3435.12 3156.12,3435.12 D1_VD1.K@3151.24,3430.24 ; D1_VD1.K@3141.47,3440.47 D1_VD1.K@3141.71,3440.24
NetD1_VD2_A: D1_VD2.A P4_VD2.1 U3_VD2.4 | length 703
  Top Copper w32: U3_VD2.4@2826,2706 2826,2760 2846,2780 3071,2780 3151,2700 D1_VD2.A@3151,2639.76 3166.76,2624 3347,2624 P4_VD2.1@3361,2610
NetD1_VD2_K: D1_VD2.K P4_VD2.2 U3_VD2.5 | length 1196.2
  Top Copper w32: U3_VD2.5@2776,2706 2776,2775 2831,2830 3251,2830 3421,2660 3421,2570 P4_VD2.2@3361,2510 3356,2505 3156,2505 D1_VD2.K@3151,2500
NetD1_VD3_A: D1_VD3.A P4_VD3.1 U3_VD3.4 | length 707.1
  Top Copper w32: U3_VD3.4@2826,1766 2826,1820 2846,1840 3061,1840 3151,1750 D1_VD3.A@3151,1689.76 3166.76,1674 3347,1674 P4_VD3.1@3361,1660
NetD1_VD3_K: D1_VD3.K P4_VD3.2 U3_VD3.5 | length 1200.3
  Top Copper w32: U3_VD3.5@2776,1766 2776,1835 2831,1890 3241,1890 3421,1710 3421,1620 P4_VD3.2@3361,1560 3356,1555 3156,1555 D1_VD3.K@3151,1550
NetD1_VD4_A: D1_VD4.A P4_VD4.1 U3_VD4.4 | length 654.6
  Top Copper w32: U3_VD4.4@2825,826 2825,880 2845,900 3070,900 3150,820 D1_VD4.A@3150,810 ; D1_VD4.A@3150.24,824.76 3325.24,824.76 P4_VD4.1@3360,790
NetD1_VD4_K: D1_VD4.K P4_VD4.2 U3_VD4.5 | length 1214.9
  Top Copper w10: P4_VD4.2@3355,685 P4_VD4.2@3360,690
  Top Copper w32: U3_VD4.5@2775,826 2775,895 2830,950 3360,950 3440,870 3440,770 P4_VD4.2@3360,690 ; D1_VD4.K@3150.24,685 P4_VD4.2@3355,685
NetD2_VD1_A: D2_VD1.A P5_VD1.1 U3_VD1.16 | length 1200.1
  Top Copper w32: U3_VD1.16@2776,3114 2776,3045 2831,2990 3241,2990 3421,3170 3421,3260 P5_VD1.1@3361,3320 3356,3325 3156.24,3325 D2_VD1.A@3151.24,3330
NetD2_VD1_K: D2_VD1.K P5_VD1.2 U3_VD1.17 | length 713
  Top Copper w32: U3_VD1.17@2826,3114 2826,3060 2846,3040 3071.24,3040 3151.24,3120 D2_VD1.K@3151.24,3190.24 3323.66,3190.24 3353.42,3220 P5_VD1.2@3361,3220
NetD2_VD2_A: D2_VD2.A P5_VD2.1 U3_VD2.16 | length 1201.2
  Top Copper w32: U3_VD2.16@2776,2174 2776,2105 2831,2050 3231,2050 3417,2236 3417,2334 P5_VD2.1@3361,2390 3356,2395 3156,2395 D2_VD2.A@3151,2400
NetD2_VD2_K: D2_VD2.K P5_VD2.2 U3_VD2.17 | length 711.4
  Top Copper w32: U3_VD2.17@2826,2174 2826,2120 2846,2100 3051.24,2100 3151,2199.76 D2_VD2.K@3151,2260.24 3323.66,2260.24 3353.42,2290 P5_VD2.2@3361,2290
NetD2_VD3_A: D2_VD3.A P5_VD3.1 U3_VD3.16 | length 1197
  Top Copper w32: U3_VD3.16@2776,1234 2776,1165 2831,1110 3241,1110 3417,1286 3417,1384 P5_VD3.1@3361,1440 3356,1445 3156,1445 D2_VD3.A@3151,1450
NetD2_VD3_K: D2_VD3.K P5_VD3.2 U3_VD3.17 | length 707.1
  Top Copper w32: U3_VD3.17@2826,1234 2826,1180 2846,1160 3061,1160 3151,1250 D2_VD3.K@3151,1310.24 3323.66,1310.24 3353.42,1340 P5_VD3.2@3361,1340
NetD2_VD4_A: D2_VD4.A P5_VD4.1 U3_VD4.16 | length 978.5
  Top Copper w10: P5_VD4.1@3355,580 P5_VD4.1@3360,575
  Top Copper w32: U3_VD4.16@2775,294 v1(2775,370) ; D2_VD4.A@3150,580 P5_VD4.1@3355,580
  Bottom Copper w32: v1(2775,370) 2800,395 2980,395 3020,435 3020,470 3060,510 3295,510 P5_VD4.1@3360,575
NetD2_VD4_K: D2_VD4.K P5_VD4.2 U3_VD4.17 | length 744.1
  Top Copper w32: U3_VD4.17@2825,294 2825,240 2845,220 3000,220 3150,370 D2_VD4.K@3150,440.24 3325.24,440.24 P5_VD4.2@3360,475
NetD3_A: D3.A R7.1 | length 115.5
  Top Copper w32: D3.A@2930,4070 2962.73,4037.27 3025.33,4037.27 R7.1@3030,4032.6
NetP6_PT1_3: P6_PT1.3 R6_PT1.1 | length 199.9
  Top Copper w32: P6_PT1.3@165,1570 332.6,1570 341.04,1578.44 347.93,1578.44 352.6,1583.11 R6_PT1.1@352.6,1590
NetP6_PT2_3: P6_PT2.3 R6_PT2.1 | length 199.9
  Top Copper w32: P6_PT2.3@165,2000 332.6,2000 341.04,2008.44 347.93,2008.44 352.6,2013.11 R6_PT2.1@352.6,2020
NetP6_PT3_3: P6_PT3.3 R6_PT3.1 | length 199.9
  Top Copper w32: P6_PT3.3@165,2420 332.6,2420 341.04,2428.44 347.93,2428.44 352.6,2433.11 R6_PT3.1@352.6,2440
NetP6_PT4_3: P6_PT4.3 R6_PT4.1 | length 202
  Top Copper w32: P6_PT4.3@165,2845 327.6,2845 341.04,2858.44 347.93,2858.44 352.6,2863.11 R6_PT4.1@352.6,2870
NetP6_PT5_3: P6_PT5.3 R6_PT5.1 | length 199.9
  Top Copper w32: P6_PT5.3@165,3270 332.6,3270 341.04,3278.44 347.93,3278.44 352.6,3283.11 R6_PT5.1@352.6,3290
NetP6_PT6_3: P6_PT6.3 R6_PT6.1 | length 202
  Top Copper w32: P6_PT6.3@165,3695 327.6,3695 341.04,3708.44 347.93,3708.44 352.6,3713.11 R6_PT6.1@352.6,3720
NetR1_1: R1.1 R2.2 U1.1 | length 180
  Top Copper w32: R2.2@2660,4397.4 R1.1@2740,4397.4 2744.67,4392.73 2797.07,4392.73 2810.04,4379.76 U1.1@2832.68,4379.76
NetR4_1: R4.1 U4.94 | length 745.7
  Top Copper w10: R4.1@530,4524.8 681.81,4524.8 892.01,4735 1090,4735 1106.89,4718.11 U4.94@1106.89,4643.35
NetR5_1: R5.1 R6.2 U5.1 | length 180
  Top Copper w32: R6.2@2660,4677.4 R5.1@2740,4677.4 2744.67,4672.73 2797.07,4672.73 2810.04,4659.76 U5.1@2832.68,4659.76
NetR8_1: R8.1 SW1.1 U4.14 | length 900.4
  Top Copper w10: R8.1@127.4,4190 R8.1@127.52,4190.12 ; SW1.1@442.48,4271.42 701.42,4271.42 756.42,4326.42 U4.14@927.76,4326.42
  Top Copper w30: R8.1@127.52,4190.12 SW1.1@127.52,4271.42
  Top Copper w32: SW1.1@126.93,4272.01 SW1.1@127.52,4271.42 ; SW1.1@136.17,4270 140,4266.17 145.25,4271.42 SW1.1@442.48,4271.42
NetU4_12: U4.12 Y1.3 | length 276.2
  Top Copper w10: Y1.3@666.02,4400.75 666.77,4400 710,4400 744.21,4365.79 U4.12@927.76,4365.79
NetU4_13: U4.13 Y1.1 | length 278.2
  Top Copper w10: Y1.1@666.02,4306.26 705.47,4306.26 745.32,4346.1 U4.13@927.76,4346.1
POT0: C27.1 P10.2 U4.17 | length 5968.5
  Top Copper w10: v2(570,4720) 560,4730 560,7230 1690,8360 2561,8360 2710,8509 P10.2@2710,8510 ; U4.17@927.76,4267.36 967.16,4267.36 976.93,4277.13 987.13,4277.13 v2(990,4280)
  Bottom Copper w10: v2(570,4720) 600,4720 910,4410 ; C27.1@934.1,4474.57 934.1,4434.1 910,4410 ; v2(990,4280) 990,4330 910,4410
POT1: C28.1 P11.2 U4.18 | length 5645.1
  Top Copper w10: v2(550,4690) 540,4700 540,7240 1680,8380 2260,8380 P11.2@2390,8510 ; v2(860,4250) 862.32,4247.68 U4.18@927.76,4247.68
  Bottom Copper w10: v2(550,4690) 860,4380 860,4360 ; C28.1@784.09,4355.43 C28.1@790,4355.43 855.43,4355.43 860,4360 ; v2(860,4250) 860,4360
POT2: C29.1 P12.2 U4.29 | length 5949.7
  Top Copper w10: v2(530,4660) 520,4670 520,7250 1670,8400 1965,8400 2070,8505 P12.2@2070,8510 ; v2(990,3930) 1047.83,3987.83 U4.29@1047.83,4048.86
  Bottom Copper w10: C29.1@495.43,4720 510.55,4704.88 510.55,4679.45 v2(530,4660) 570,4620 570,4120 770,3920 975.94,3920 985.94,3930 v2(990,3930)
POT3: C30.1 P13.2 U4.30 | length 5839.5
  Top Copper w10: v2(510,4630) 500,4640 500,7259 1745,8504 P13.2@1745,8515 ; v2(1020,3910) 1067.52,3957.52 U4.30@1067.52,4048.86
  Bottom Copper w10: C30.1@355.43,4690 368.98,4676.46 463.54,4676.46 v2(510,4630) 550,4590 550,4111.72 761.72,3900 1005.94,3900 1015.94,3910 v2(1020,3910)
POT4: C31.1 P14.2 U4.33 | length 5805.7
  Top Copper w10: v2(490,4600) 480,4610 480,7269 1430,8219 P14.2@1430,8510 ; U4.33@1126.57,4048.86 1128.11,4047.32 1128.11,3971.89 1140,3960 v2(1140,3910)
  Bottom Copper w10: C31.1@395.43,4610 405.43,4600 v2(490,4600) 530,4560 530,4100 780,3850 1080,3850 v2(1140,3910)
POT5: C32.1 P15.2 U4.34 | length 5774
  Top Copper w10: v2(470,4570) 460,4580 460,7855 1097.5,8492.5 P15.2@1122.5,8492.5 ; U4.34@1146.26,4048.86 1146.26,3993.74 1170,3970 v2(1170,3880)
  Bottom Copper w10: C32.1@395.43,4530 395.43,4535.91 429.53,4570 v2(470,4570) 510,4530 510,4090 770,3830 1120,3830 v2(1170,3880)
POT6: C33.1 P16.2 U4.36 | length 5690.5
  Top Copper w10: v2(450,4540) 440,4550 440,8160 P16.2@790,8510 ; U4.36@1185.63,4048.86 1185.63,3994.37 1200,3980 1200,3850.51 v2(1199.49,3850)
  Bottom Copper w10: C33.1@440,4455.43 485.43,4455.43 490,4460 ; v2(450,4540) 490,4500 490,4460 ; v2(1199.49,3850) 1159.49,3810 760,3810 490,4080 490,4460
SOL_A_inC1: U3_VD1.7 U4.64 | length 1614.8
  Top Copper w10: U4.64@1522.24,4365.79 1819.06,4365.79 1904.84,4280 2320,4280 2676,3924 U3_VD1.7@2676,3646
SOL_A_inC2: U3_VD2.7 U4.58 | length 2253.9
  Top Copper w10: U4.58@1522.24,4247.68 1752.32,4247.68 2340,3660 2340,3010 2470,2880 2640,2880 2676,2844 U3_VD2.7@2676,2706
SOL_A_inC3: U3_VD3.7 U4.52 | length 3039.6
  Top Copper w10: U4.52@1522.24,4129.57 1690.43,4129.57 2220,3600 2220,2190 2470,1940 2640,1940 2676,1904 U3_VD3.7@2676,1766
SOL_A_inC4: U3_VD4.7 U4.43 | length 3882.3
  Top Copper w10: U4.43@1323.43,4048.86 1323.43,3681.57 2100,2905 2100,1370 2470,1000 2640,1000 2675,965 U3_VD4.7@2675,826
SOL_A_inD1: U3_VD1.9 U4.62 | length 1509.7
  Top Copper w10: U4.62@1522.24,4326.42 1798.58,4326.42 1905,4220 2299.17,4220 2576,3943.17 U3_VD1.9@2576,3646
SOL_A_inD2: U3_VD2.9 U4.56 | length 2131.8
  Top Copper w10: U4.56@1522.24,4208.31 1731.69,4208.31 2300,3640 2300,2990 2450,2840 2570,2840 2576,2834 U3_VD2.9@2576,2706
SOL_A_inD3: U3_VD3.9 U4.47 | length 2839.4
  Top Copper w10: U4.47@1402.17,4048.86 1402.17,3722.83 2180,2945 2180,2170 2450,1900 2570,1900 2576,1894 U3_VD3.9@2576,1766
SOL_A_inD4: U3_VD4.9 U4.41 | length 3827.4
  Top Copper w10: U4.41@1284.06,4048.86 1284.06,3660.94 2060,2885 2060,1350 2450,960 2569.14,960 2575,954.14 U3_VD4.9@2575,826
SOL_B_inC1: U3_VD1.13 U4.61 | length 2209.4
  Top Copper w10: U4.61@1522.24,4306.73 1783.27,4306.73 2400,3690 2400,3040 2500,2940 2600,2940 2626,2966 U3_VD1.13@2626,3114
SOL_B_inC2: U3_VD2.13 U4.55 | length 2995
  Top Copper w10: U4.55@1522.24,4188.62 1721.38,4188.62 2280,3630 2280,2220 2500,2000 2600,2000 2626,2026 U3_VD2.13@2626,2174
SOL_B_inC3: U3_VD3.13 U4.46 | length 3736.5
  Top Copper w10: U4.46@1382.48,4048.86 1382.48,3712.52 2160,2935 2160,1400 2500,1060 2600,1060 2626,1086 U3_VD3.13@2626,1234
SOL_B_inC4: U3_VD4.13
SOL_B_inD1: U3_VD1.15 U4.59 | length 2314.5
  Top Copper w10: U4.59@1522.24,4267.36 1762.64,4267.36 2360,3670 2360,3020 2480,2900 2640,2900 2726,2986 U3_VD1.15@2726,3114
SOL_B_inD2: U3_VD2.15 U4.53 | length 3099.7
  Top Copper w10: U4.53@1522.24,4149.25 1700,4149.25 2240,3609.25 2240,2200 2480,1960 2640,1960 2726,2046 U3_VD2.15@2726,2174
SOL_B_inD3: U3_VD3.15 U4.44 | length 3909.4
  Top Copper w10: U4.44@1343.11,4048.86 1343.11,3691.89 2120,2915 2120,1380 2480,1020 2640,1020 2726,1106 U3_VD3.15@2726,1234
SOL_B_inD4: U3_VD4.15
SWCLK: P3.2 U4.76 | length 2067.5
  Top Copper w10: U4.76@1461.22,4643.35 1503.35,4643.35 1720,4860 3340,4860 P3.2@3410,4930
SWDIO: P3.4 U4.72 | length 2103.1
  Top Copper w10: U4.72@1522.24,4523.27 1713.27,4523.27 1740,4550 1740,4620 1950,4830 3320,4830 3410,4740 P3.4@3410,4730
pads on no net: J1_T1.G J1_T2.G J1_T3.G J1_T4.G J1_T5.G J1_T6.G J1_T7.G J1_T8.G U2.5 U2.8 U3_T1.6 U3_T1.7 U3_T1.13 U3_T2.6 U3_T2.7 U3_T2.13 U3_T3.6 U3_T3.7 U3_T3.13 U3_T4.6 U3_T4.7 U3_T4.13 U3_T5.6 U3_T5.7 U3_T5.13 U3_T6.6 U3_T6.7 U3_T6.13 U3_T7.6 U3_T7.7 U3_T7.13 U3_T8.6 U3_T8.7 U3_T8.13 U3_VD1.3 U3_VD1.18 U3_VD2.3 U3_VD2.18 U3_VD3.3 U3_VD3.18 U3_VD4.3 U3_VD4.18 U4.1 U4.2 U4.3 U4.4 U4.5 U4.7 U4.8 U4.9 U4.35 U4.37 U4.38 U4.39 U4.40 U4.65 U4.66 U4.67 U4.68 U4.69 U4.77 U4.78 U4.79 U4.90 U4.91 U4.92 U4.93 U4.95 U4.96 U4.97 U4.98

## Polygon pours and split planes (outlines as drawn)
no net on Bottom Copper "Bottom Layer-No Net 1" (solid, pour order 0): 200,4820
GND on Signal Layer 2 (solid, pour order 6): 25,8625 3475,8625 3475,25 25,25
no net on Signal Layer 2 (solid, pour order 4): 3440,3860

## Keep-outs
Keep-Out Layer:
  the board outline again, w47.24

## Silkscreen, mask and mechanical layers (free items; w line width, h text height)
Top Overlay:
  drawing of 3710 lines, arcs and shapes, not listed
  text "Rocket Avionics Board / Ray Wendt / March 2019" at 1140,7440 h60